# Altium PCB PCB V1.PCBDOC
Units mil, origin at the board's own origin, x right, y up, seen from the top; angles counter-clockwise.
Board outline 3040 x 4170 mil, 2 copper layers (Top Layer, Bottom Layer); 80 components, 0 nets, 300 pads, 0 vias.
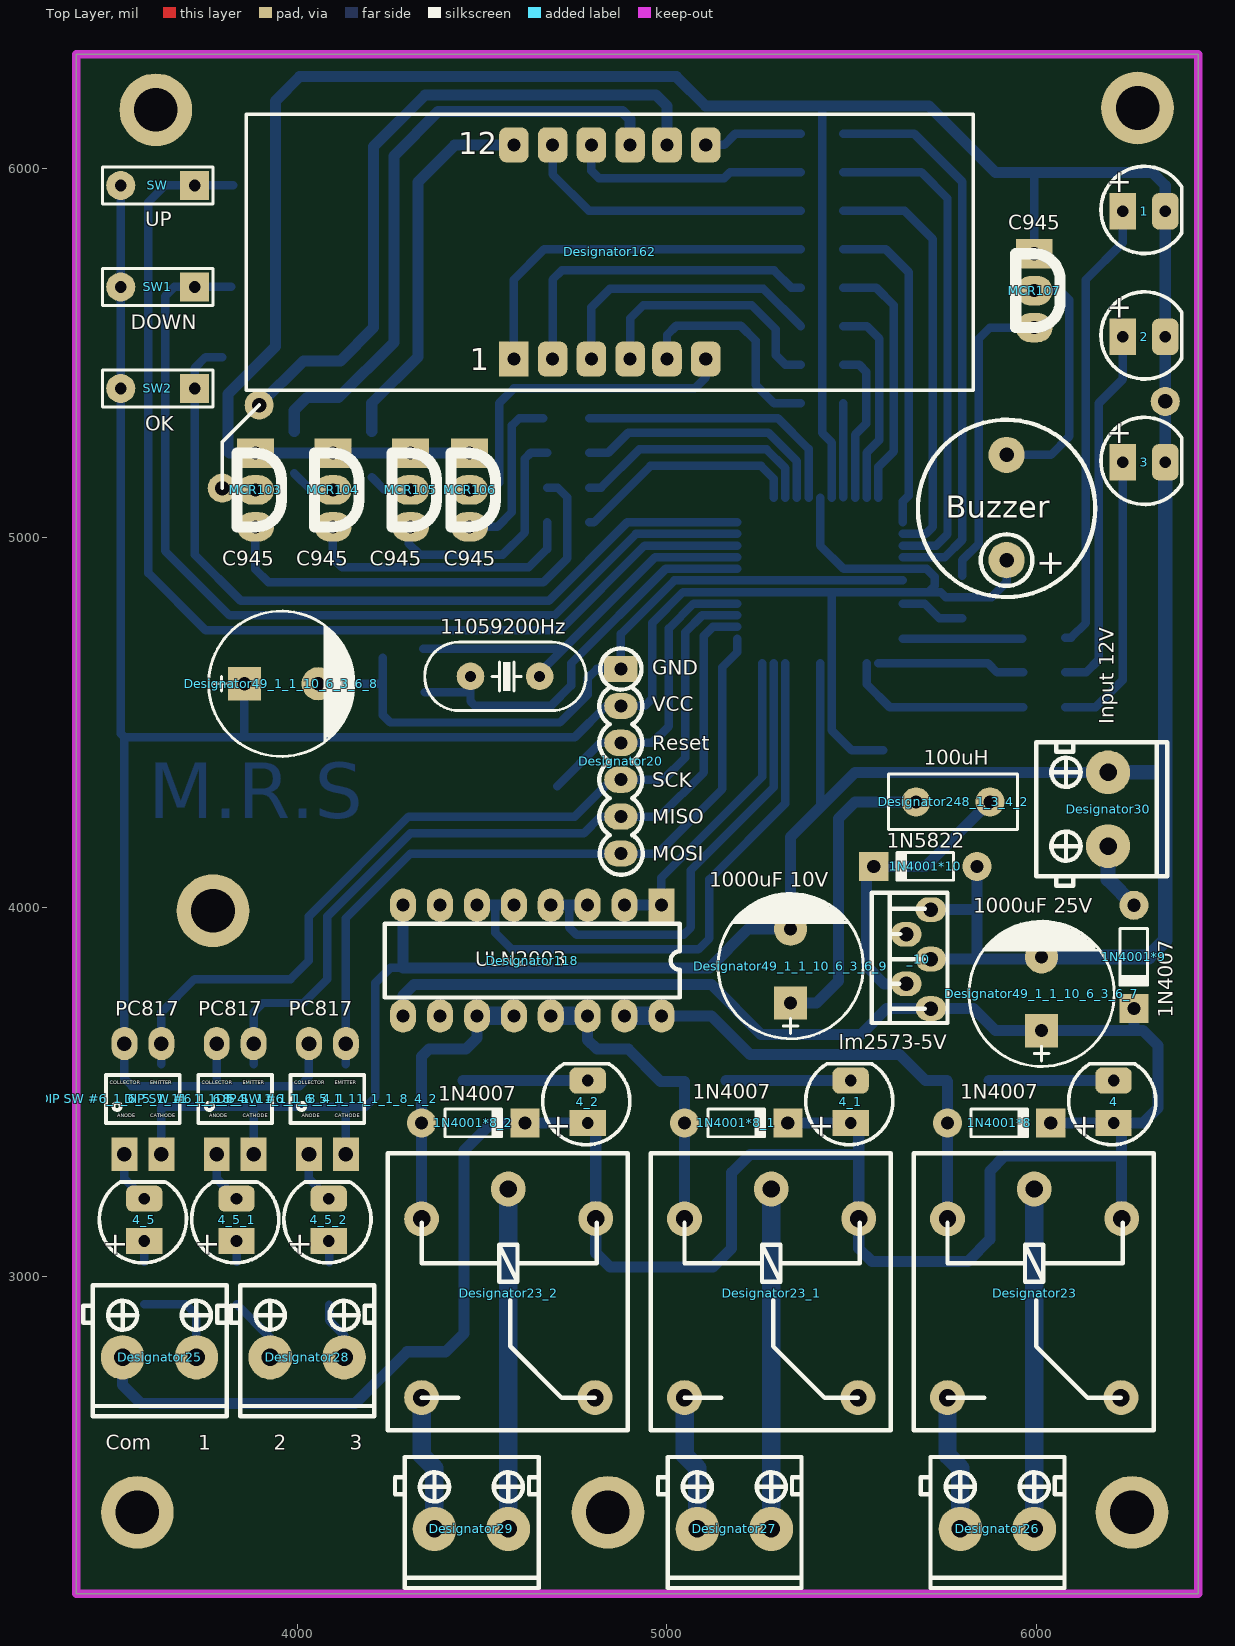
[diagram p0: Top Layer view]
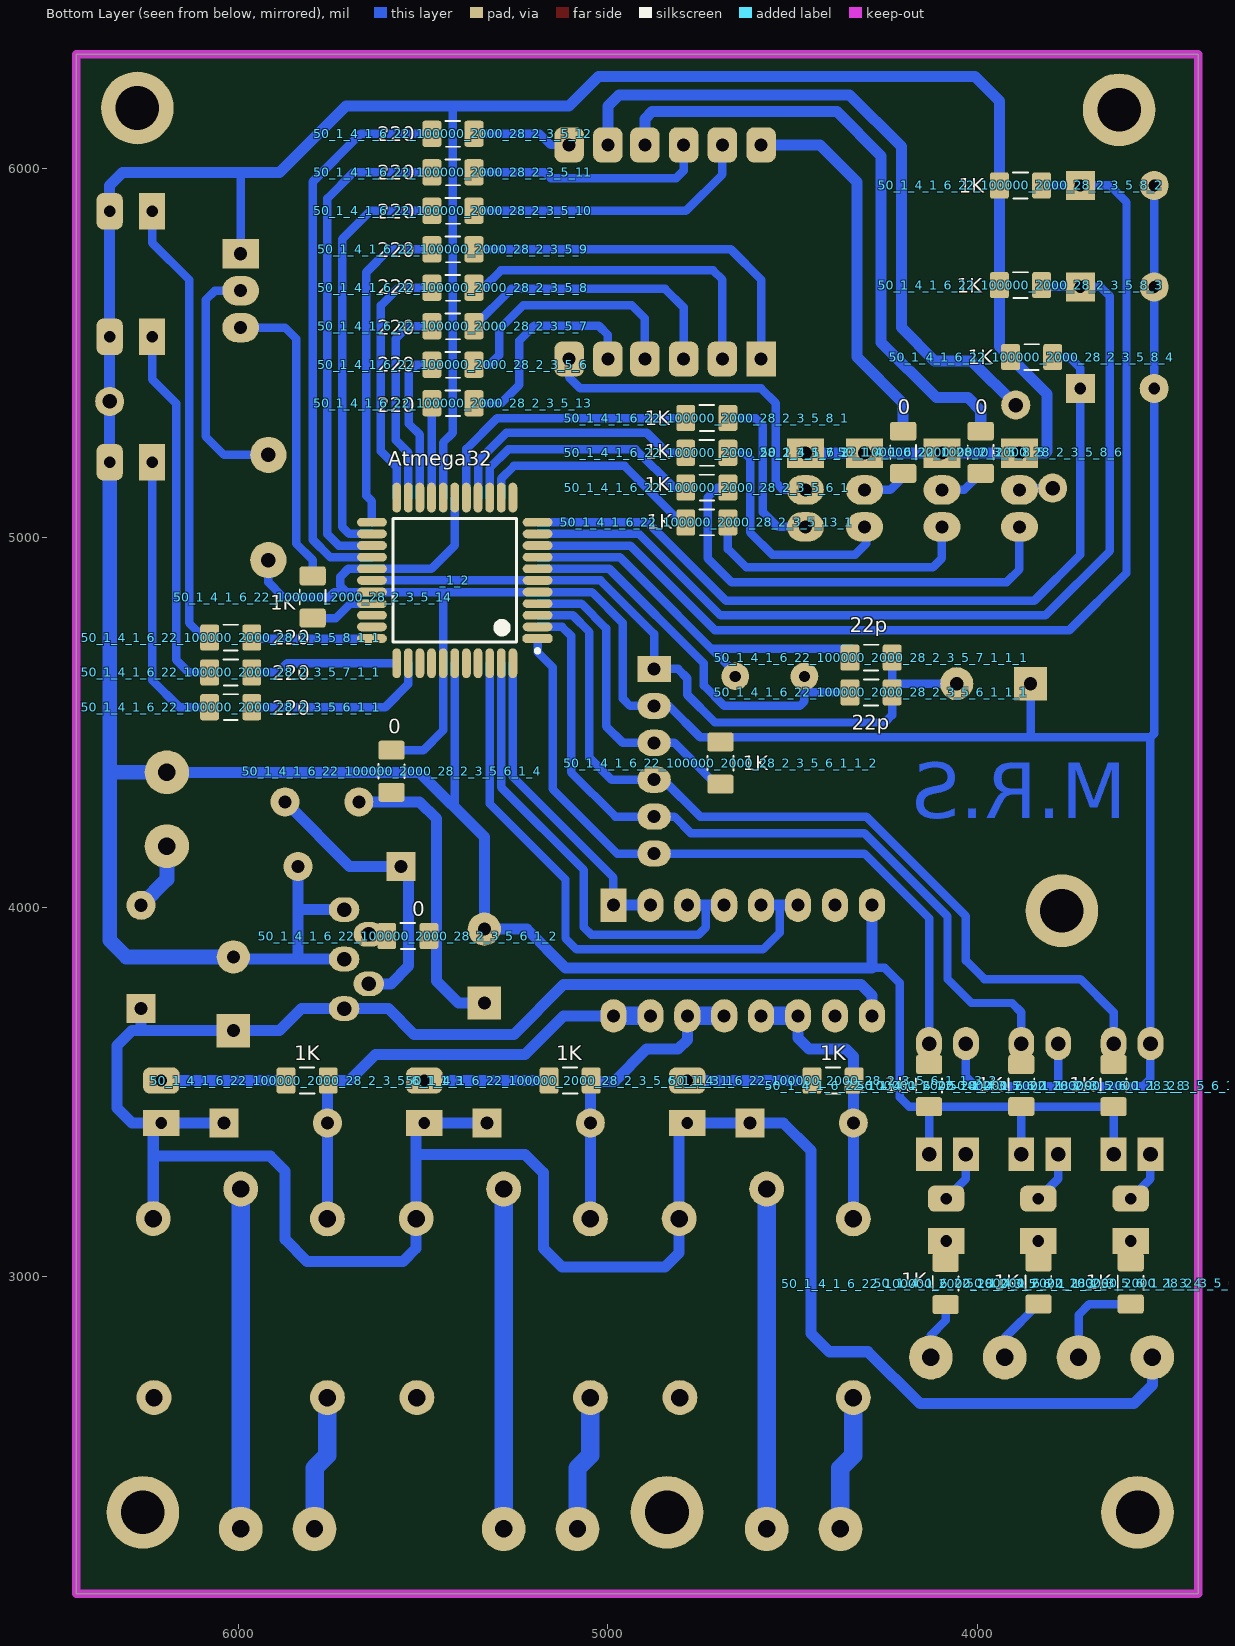
[diagram p1: Bottom Layer view, seen from below]

## Layer stack, top to bottom
Top Layer: signal copper 1.4
Dielectric: dielectric 12.6, FR-4, Dk 4.8
Bottom Layer: signal copper 1.4

## Board outline
3400,6310 6440,6310 6440,2140 3400,2140

## Design rules (kind name [scope] priority, off if disabled: settings)
Clearance [All] p1: gap=10
ComponentClearance [All] p1: gap=10 collisioncheckmode=3 verticalgap=10
PolygonConnect [All] p1: connectstyle=Relief reliefconductorwidth=10 reliefentries=4 polygonreliefangle="90 Angle"
RoutingVias [All] p1: holewidth=28 width=50 viastyle="Through Hole" minholewidth=28 minwidth=50 maxholewidth=28 maxwidth=50
SolderMaskExpansion [All] p1: expansion=4
TestPointUsage [All] p1: valid=0 allowmultiple=FALSE
Testpoint [All] p1: side=15 testpointundercomponent=TRUE minsize=40 maxsize=100 preferedsize=60 minholesize=0 maxholesize=40 preferedholesize=32 testpointgrid=1 style=1023 order=0-112345678
Width [All] p1: maxlimit=10 minlimit=10 preferedwidth=10
18 further rules are at their usual default settings.

## Components (designator, comment, footprint, x,y, rotation, side; value= is the part's Value field where it differs from the comment)
1 "Comment" LED-1 6290,5885 r90 top
1N4001*8 "Comment" DIO7.1-3.9x1.9 5900,3415 r0 top
1N4001*8_1 "Comment" DIO7.1-3.9x1.9 5187.5,3415 r0 top
1N4001*8_2 "Comment" DIO7.1-3.9x1.9 4475,3415 r0 top
1N4001*9 "Comment" DIO7.1-3.9x1.9 6265,3865 r270 top
1N4001*10 "Comment" DIO7.1-3.9x1.9 5700,4110 r180 top
2 "Comment" LED-1 6290,5545 r90 top
3 "Comment" LED-1 6290,5205 r90 top
4 "Comment" LED-1 6210,3470 r180 top
4_1 "Comment" LED-1 5497.5,3470 r180 top
4_2 "Comment" LED-1 4785,3470 r180 top
4_5 "Comment" LED-1 3583.69,3150 r180 top
4_5_1 "Comment" LED-1 3833.69,3150 r180 top
4_5_2 "Comment" LED-1 4083.69,3150 r180 top
50_1_4_1_6_22_100000_2000_28_2_3_5_6 "Comment" RESC3216X70N 5420,5469.29 r0 bottom
50_1_4_1_6_22_100000_2000_28_2_3_5_6_1 "Comment" RESC3216X70N 4732.09,5136.43 r0 bottom
50_1_4_1_6_22_100000_2000_28_2_3_5_6_1_1 "Comment" RESC3216X70N 6022.09,4541.43 r0 bottom
50_1_4_1_6_22_100000_2000_28_2_3_5_6_1_1_1 "Comment" RESC3216X70N 4287.09,4581.43 r0 bottom
50_1_4_1_6_22_100000_2000_28_2_3_5_6_1_1_2 "Comment" RESC3216X70N 4695,4390 r90 bottom
50_1_4_1_6_22_100000_2000_28_2_3_5_6_1_1_3 "Comment" RESC3216X70N 5815,3530 r180 bottom
50_1_4_1_6_22_100000_2000_28_2_3_5_6_1_1_3_1 "Comment" RESC3216X70N 5102.5,3530 r180 bottom
50_1_4_1_6_22_100000_2000_28_2_3_5_6_1_1_3_2 "Comment" RESC3216X70N 4390,3530 r180 bottom
50_1_4_1_6_22_100000_2000_28_2_3_5_6_1_1_3_3 "Comment" RESC3216X70N 4085,2980 r270 bottom
50_1_4_1_6_22_100000_2000_28_2_3_5_6_1_1_3_4 "Comment" RESC3216X70N 3833.69,2981.31 r270 bottom
50_1_4_1_6_22_100000_2000_28_2_3_5_6_1_1_3_5 "Comment" RESC3216X70N 3583.69,2981.31 r270 bottom
50_1_4_1_6_22_100000_2000_28_2_3_5_6_1_1_3_7 "Comment" RESC3216X70N 3630,3516.31 r270 bottom
50_1_4_1_6_22_100000_2000_28_2_3_5_6_1_1_3_8 "Comment" RESC3216X70N 3880,3516.31 r270 bottom
50_1_4_1_6_22_100000_2000_28_2_3_5_6_1_1_3_9 "Comment" RESC3216X70N 4130,3516.31 r270 bottom
50_1_4_1_6_22_100000_2000_28_2_3_5_6_1_2 "Comment" RESC3216X70N 5542.09,3921.43 r0 bottom
50_1_4_1_6_22_100000_2000_28_2_3_5_6_1_4 "Comment" RESC3216X70N 5586.43,4367.91 r270 bottom
50_1_4_1_6_22_100000_2000_28_2_3_5_7 "Comment" RESC3216X70N 5420,5573.57 r0 bottom
50_1_4_1_6_22_100000_2000_28_2_3_5_7_1 "Comment" RESC3216X70N 4732.09,5230.71 r0 bottom
50_1_4_1_6_22_100000_2000_28_2_3_5_7_1_1 "Comment" RESC3216X70N 6022.09,4635.71 r0 bottom
50_1_4_1_6_22_100000_2000_28_2_3_5_7_1_1_1 "Comment" RESC3216X70N 4287.09,4675.71 r0 bottom
50_1_4_1_6_22_100000_2000_28_2_3_5_8 "Comment" RESC3216X70N 5420,5677.86 r0 bottom
50_1_4_1_6_22_100000_2000_28_2_3_5_8_1 "Comment" RESC3216X70N 4732.09,5325 r0 bottom
50_1_4_1_6_22_100000_2000_28_2_3_5_8_1_1 "Comment" RESC3216X70N 6022.09,4730 r0 bottom
50_1_4_1_6_22_100000_2000_28_2_3_5_8_2 "Comment" RESC3216X70N 3882.09,5955 r0 bottom
50_1_4_1_6_22_100000_2000_28_2_3_5_8_3 "Comment" RESC3216X70N 3882.09,5685 r0 bottom
50_1_4_1_6_22_100000_2000_28_2_3_5_8_4 "Comment" RESC3216X70N 3852.09,5490 r0 bottom
50_1_4_1_6_22_100000_2000_28_2_3_5_8_5 "Comment" RESC3216X70N 4200,5232.09 r90 bottom
50_1_4_1_6_22_100000_2000_28_2_3_5_8_6 "Comment" RESC3216X70N 3990,5232.09 r90 bottom
50_1_4_1_6_22_100000_2000_28_2_3_5_9 "Comment" RESC3216X70N 5420,5782.14 r0 bottom
50_1_4_1_6_22_100000_2000_28_2_3_5_10 "Comment" RESC3216X70N 5420,5886.43 r0 bottom
50_1_4_1_6_22_100000_2000_28_2_3_5_11 "Comment" RESC3216X70N 5420,5990.71 r0 bottom
50_1_4_1_6_22_100000_2000_28_2_3_5_12 "Comment" RESC3216X70N 5420,6095 r0 bottom
50_1_4_1_6_22_100000_2000_28_2_3_5_13 "Comment" RESC3216X70N 5420,5365 r0 bottom
50_1_4_1_6_22_100000_2000_28_2_3_5_13_1 "Comment" RESC3216X70N 4732.09,5042.14 r0 bottom
50_1_4_1_6_22_100000_2000_28_2_3_5_14 "Comment" RESC3216X70N 5800,4840 r270 bottom
_1_2 "Comment" My_44A_M 5415,4885 r0 bottom
_10 "Comment" "CASE 314B–05" 5715,3725 r90 top
Buzzer "Comment" BUZZER 5920,4940 r270 top
Designator20 "Comment" SIP6 4875,4645 r270 top
Designator23 "Comment" RELAY3 5760,3155 r0 top
Designator23_1 "Comment" RELAY3 5047.5,3155 r0 top
Designator23_2 "Comment" RELAY3 4335,3155 r0 top
Designator25 "Comment" TER2 3525,2780 r180 top
Designator26 "Comment" TER2 5795,2315 r180 top
Designator27 "Comment" TER2 5082.5,2315 r180 top
Designator28 "Comment" TER2 3925,2780 r180 top
Designator29 "Comment" TER2 4370,2315 r180 top
Designator30 "Comment" TER2 6195,4165 r270 top
Designator49_1_1_10_6_3_6_7 "Comment" "cap 04" 6015,3765 r270 top
Designator49_1_1_10_6_3_6_8 "Comment" "cap 04" 3955,4605 r180 top
Designator49_1_1_10_6_3_6_9 "Comment" "cap 04" 5335,3840 r270 top
Designator118 "Comment" DIP16 4985,4005 r270 top
Designator162 "Comment" 7segCA 3860,5400 r0 top
Designator248_1_3_4_2 "" RAD-0.2 5775,4285 r180 top
"DIP SW #6_1_6_5_1_11_1_1_8_4" "Comment" "OPTO #1" 3530,3330 r0 top
"DIP SW #6_1_6_5_1_11_1_1_8_4_1" "Comment" "OPTO #1" 3780,3330 r0 top
"DIP SW #6_1_6_5_1_11_1_1_8_4_2" "Comment" "OPTO #1" 4030,3330 r0 top
MCR103 "" 2N5551 3885,5230 r180 top
MCR104 "" 2N5551 4095,5230 r180 top
MCR105 "" 2N5551 4305,5230 r180 top
MCR106 "" 2N5551 4465,5230 r180 top
MCR107 "" 2N5551 5995,5770 r180 top
SW "Comment" HDR1X3 3720,5955 r180 top
SW1 "Comment" HDR1X3 3720,5680 r180 top
SW2 "Comment" HDR1X3 3720,5405 r180 top
? "Comment" XTAL 4655,4625 r180 top

## Footprints (in the part's own frame and the unit in brackets; to place one, negate y for a bottom-side part, rotate by r counter-clockwise, add the part's x,y. Pads: shape width x height; smd on the part's side, far side on the other; paste and mask are expansions set on the pad)
2N5551 [mil]
  oval 100x80 hole 35.43: g(0,100) o(0,200)
  rect 100x80 hole 35.43: i(0,0)
  silkscreen extent -70,0 50,200
7segCA [mil] "7seg-CA; 12 Leads"
  rrect50% 80x94.49 hole 35.43: 1(725,665) 2(1040,665) 3(1140,665) 4(1245,85) .(935,85) A(830,665) B(1245,665) C(1040,85) D(830,85) F(935,665) G(1140,85)
  rect 80x94.49 hole 35.43: E(725,85)
  silkscreen extent 0,0 1970,748
BUZZER [mm]
  round 2.5 hole 1: 1(0,0) 2(-7.239,0)
  silkscreen extent -9.66,-6.1 2.54,6.1
"cap 04" [mil]
  rect 90x90 hole 35.43: 1(100,0)
  round 90 hole 35.43: 2(-100,0)
  silkscreen extent -197,-197 197,197, body extent -198,-197 198,199, height 513
"CASE 314B–05" [mm]
  oval 1.7x2.1 hole 1: 1(0,0) 2(1.702,1.702) 3(3.404,0) 4(5.105,1.702) 5(6.807,0)
  silkscreen extent -0.99,-1.14 7.98,4.06
DIO7.1-3.9x1.9 [mm]
  round 2 hole 0.9: 1(-3.55,0)
  rect 2x2 hole 0.9: 2(3.55,0)
  silkscreen extent -1.95,-0.95 2.05,0.95
DIP16 [mm]
  rect 2.3x1.8 hole 0.9: 1(0,0)
  oval 2.3x1.8 hole 0.9: 2(0,-2.54) 3(0,-5.08) 4(0,-7.62) 5(0,-10.16) 6(0,-12.7) 7(0,-15.24) 10(7.62,-15.24) 11(7.62,-12.7) 12(7.62,-10.16) 13(7.62,-7.62) 14(7.62,-5.08) 15(7.62,-2.54) 16(7.62,0) gnd(0,-17.78) vcc(7.62,-17.78)
  silkscreen extent 1.27,-19.05 6.35,1.27
HDR1X3 [mm]
  round 0 all layers, no hole: 2(2.54,0)
  round 2 hole 0.8: +(5.08,0)
  rect 2x2 hole 0.8: -(0,0)
  silkscreen extent -1.27,-1.27 6.35,1.27
LED-1 [mm] "LED; 2 Leads"
  rect 2.5x1.8 hole 0.8: 1(0,1.397)
  rrect50% 2.5x1.8 hole 0.8: 2(0,-1.524)
  silkscreen extent -2.91,-2.67 3.09,2.9
My_44A_M [mm]
  oval 2.05x0.6 smd: 7(-5.7,-0.8) 8(-5.7,-1.6) 10(-5.7,-3.2) 11(-5.7,-4) 23(5.7,-4) 24(5.7,-3.2) 25(5.7,-2.4) 31(5.7,2.4) 32(5.7,3.2) 33(5.7,4) A7(5.7,1.6) AREF(5.7,0.8) AVCC(5.7,-0.8) C7(5.7,-1.6) D0(-5.7,-2.4) GND(-5.7,0) GND(5.7,0) Miso(-5.7,3.2) RES(-5.7,1.6) SCk(-5.7,2.4) VCC(-5.7,0.8)
  oval 0.6x2.05 smd: 12(-4,-5.7) 13(-3.2,-5.7) 14(-2.4,-5.7) 15(-1.6,-5.7) 20(2.4,-5.7) 21(3.2,-5.7) 22(4,-5.7) 34(4,5.7) 35(3.2,5.7) 36(2.4,5.7) 41(-1.6,5.7) 42(-2.4,5.7) 43(-3.2,5.7) A0(1.6,5.7) B0(-0.8,5.7) C0(1.6,-5.7) D7(-0.8,-5.7) GND(0,5.7) GND(0.8,-5.7) ss(-4,5.7) VCC(0,-5.7) VCC(0.8,5.7)
  oct 2.05x0.6 smd: Mosi(-5.7,4)
  silkscreen extent -5.82,-4.25 4.25,4.97, body extent -5,-5 5,5, height 1.2
"OPTO #1" [mil]
  rect 70x90 hole 39.37: ANODE(0,0) CATHODE(100,0)
  oval 70x90 hole 39.37: COLLECTOR(0,300) EMITTER(100,300)
  silkscreen extent -50,85 150,215
RAD-0.2 [mm]
  round 2 hole 0.9: 1(-2.54,0) 2(2.54,0)
  silkscreen extent -4.44,-1.91 4.44,1.91
RELAY3 [mm]
  round 2.4 hole 1.2: 1(0,0) 2(11.989,0.025) 3(5.969,2.057) 4(11.938,-12.294) 5(0,-12.294)
  silkscreen extent -2.34,-14.55 14.2,4.52
RESC3216X70N [mm] "Chip Resistor, Body 3.2x1.6mm, EIA 1206, IPC Medium Density"
  round 0.508 on Mech15: 0(0,0)
  rrect25% 1.3x1.8 smd: 1(-1.45,0) 2(1.45,0)
  silkscreen extent -0.51,-0.89 0.51,0.89, body extent -1.62,-0.82 1.63,0.83, height 0.69
SIP6 [mm]
  rect 1.8x2.3 hole 0.9: 1(0,0)
  oval 1.8x2.3 hole 0.9: 2(2.54,0) 3(5.08,0) 4(7.62,0) 5(10.16,0) 6(12.7,0)
  silkscreen extent -1.42,-1.48 14.16,1.5
TER2 [mm]
  oval 3x3.048 hole 1.2: 1(0,0) 2(-5.08,0)
  silkscreen extent -7.16,-4.95 2.72,4.06
XTAL [mil]
  round 75 hole 30: 1(0,0) 2(187.4,0)
  silkscreen extent -126,-93 311,93, body extent -131,-94 316,95, height 514

## Part data
SW SW1 SW2: library part "Header 3"

## Free pads (board coordinates)
  round 196.85 hole 118.11: 0(3565,2360) 0(3615,6160) 0(3770,3990) 0(4840,2360) 0(6260,2360) 0(6275,6165)
  round 78.74 hole 39.37: 6(6350,5370) 7(3795,5135) 8(3895,5360)

## Nets (pads, with @x,y where several pads share a name; then routed paths per layer and width w, separated by ;. In a path a pad name is that pad's centre, name@x,y a point inside that pad or via, vN(x,y) a via of type N, cw(c..) or ccw(c..) an arc to the next point about the centre after c; other vN are vias at no path point)
pads on no net: 1.1 1.2 1N4001*8.1 1N4001*8.2 1N4001*8_1.1 1N4001*8_1.2 1N4001*8_2.1 1N4001*8_2.2 1N4001*9.1 1N4001*9.2 1N4001*10.1 1N4001*10.2 2.1 2.2 3.1 3.2 4.1 4.2 4_1.1 4_1.2 4_2.1 4_2.2 4_5.1 4_5.2 4_5_1.1 4_5_1.2 4_5_2.1 4_5_2.2 50_1_4_1_6_22_100000_2000_28_2_3_5_6.0 50_1_4_1_6_22_100000_2000_28_2_3_5_6.1 50_1_4_1_6_22_100000_2000_28_2_3_5_6.2 50_1_4_1_6_22_100000_2000_28_2_3_5_6_1.0 50_1_4_1_6_22_100000_2000_28_2_3_5_6_1.1 50_1_4_1_6_22_100000_2000_28_2_3_5_6_1.2 50_1_4_1_6_22_100000_2000_28_2_3_5_6_1_1.0 50_1_4_1_6_22_100000_2000_28_2_3_5_6_1_1.1 50_1_4_1_6_22_100000_2000_28_2_3_5_6_1_1.2 50_1_4_1_6_22_100000_2000_28_2_3_5_6_1_1_1.0 50_1_4_1_6_22_100000_2000_28_2_3_5_6_1_1_1.1 50_1_4_1_6_22_100000_2000_28_2_3_5_6_1_1_1.2 50_1_4_1_6_22_100000_2000_28_2_3_5_6_1_1_2.0 50_1_4_1_6_22_100000_2000_28_2_3_5_6_1_1_2.1 50_1_4_1_6_22_100000_2000_28_2_3_5_6_1_1_2.2 50_1_4_1_6_22_100000_2000_28_2_3_5_6_1_1_3.0 50_1_4_1_6_22_100000_2000_28_2_3_5_6_1_1_3.1 50_1_4_1_6_22_100000_2000_28_2_3_5_6_1_1_3.2 50_1_4_1_6_22_100000_2000_28_2_3_5_6_1_1_3_1.0 50_1_4_1_6_22_100000_2000_28_2_3_5_6_1_1_3_1.1 50_1_4_1_6_22_100000_2000_28_2_3_5_6_1_1_3_1.2 50_1_4_1_6_22_100000_2000_28_2_3_5_6_1_1_3_2.0 50_1_4_1_6_22_100000_2000_28_2_3_5_6_1_1_3_2.1 50_1_4_1_6_22_100000_2000_28_2_3_5_6_1_1_3_2.2 50_1_4_1_6_22_100000_2000_28_2_3_5_6_1_1_3_3.0 50_1_4_1_6_22_100000_2000_28_2_3_5_6_1_1_3_3.1 50_1_4_1_6_22_100000_2000_28_2_3_5_6_1_1_3_3.2 50_1_4_1_6_22_100000_2000_28_2_3_5_6_1_1_3_4.0 50_1_4_1_6_22_100000_2000_28_2_3_5_6_1_1_3_4.1 50_1_4_1_6_22_100000_2000_28_2_3_5_6_1_1_3_4.2 50_1_4_1_6_22_100000_2000_28_2_3_5_6_1_1_3_5.0 50_1_4_1_6_22_100000_2000_28_2_3_5_6_1_1_3_5.1 50_1_4_1_6_22_100000_2000_28_2_3_5_6_1_1_3_5.2 50_1_4_1_6_22_100000_2000_28_2_3_5_6_1_1_3_7.0 50_1_4_1_6_22_100000_2000_28_2_3_5_6_1_1_3_7.1 50_1_4_1_6_22_100000_2000_28_2_3_5_6_1_1_3_7.2 50_1_4_1_6_22_100000_2000_28_2_3_5_6_1_1_3_8.0 50_1_4_1_6_22_100000_2000_28_2_3_5_6_1_1_3_8.1 50_1_4_1_6_22_100000_2000_28_2_3_5_6_1_1_3_8.2 50_1_4_1_6_22_100000_2000_28_2_3_5_6_1_1_3_9.0 50_1_4_1_6_22_100000_2000_28_2_3_5_6_1_1_3_9.1 50_1_4_1_6_22_100000_2000_28_2_3_5_6_1_1_3_9.2 50_1_4_1_6_22_100000_2000_28_2_3_5_6_1_2.0 50_1_4_1_6_22_100000_2000_28_2_3_5_6_1_2.1 50_1_4_1_6_22_100000_2000_28_2_3_5_6_1_2.2 50_1_4_1_6_22_100000_2000_28_2_3_5_6_1_4.0 50_1_4_1_6_22_100000_2000_28_2_3_5_6_1_4.1 50_1_4_1_6_22_100000_2000_28_2_3_5_6_1_4.2 50_1_4_1_6_22_100000_2000_28_2_3_5_7.0 50_1_4_1_6_22_100000_2000_28_2_3_5_7.1 50_1_4_1_6_22_100000_2000_28_2_3_5_7.2 50_1_4_1_6_22_100000_2000_28_2_3_5_7_1.0 50_1_4_1_6_22_100000_2000_28_2_3_5_7_1.1 50_1_4_1_6_22_100000_2000_28_2_3_5_7_1.2 50_1_4_1_6_22_100000_2000_28_2_3_5_7_1_1.0 50_1_4_1_6_22_100000_2000_28_2_3_5_7_1_1.1 50_1_4_1_6_22_100000_2000_28_2_3_5_7_1_1.2 50_1_4_1_6_22_100000_2000_28_2_3_5_7_1_1_1.0 50_1_4_1_6_22_100000_2000_28_2_3_5_7_1_1_1.1 50_1_4_1_6_22_100000_2000_28_2_3_5_7_1_1_1.2 50_1_4_1_6_22_100000_2000_28_2_3_5_8.0 50_1_4_1_6_22_100000_2000_28_2_3_5_8.1 50_1_4_1_6_22_100000_2000_28_2_3_5_8.2 50_1_4_1_6_22_100000_2000_28_2_3_5_8_1.0 50_1_4_1_6_22_100000_2000_28_2_3_5_8_1.1 50_1_4_1_6_22_100000_2000_28_2_3_5_8_1.2 50_1_4_1_6_22_100000_2000_28_2_3_5_8_1_1.0 50_1_4_1_6_22_100000_2000_28_2_3_5_8_1_1.1 50_1_4_1_6_22_100000_2000_28_2_3_5_8_1_1.2 50_1_4_1_6_22_100000_2000_28_2_3_5_8_2.0 50_1_4_1_6_22_100000_2000_28_2_3_5_8_2.1 50_1_4_1_6_22_100000_2000_28_2_3_5_8_2.2 50_1_4_1_6_22_100000_2000_28_2_3_5_8_3.0 50_1_4_1_6_22_100000_2000_28_2_3_5_8_3.1 50_1_4_1_6_22_100000_2000_28_2_3_5_8_3.2 50_1_4_1_6_22_100000_2000_28_2_3_5_8_4.0 50_1_4_1_6_22_100000_2000_28_2_3_5_8_4.1 50_1_4_1_6_22_100000_2000_28_2_3_5_8_4.2 50_1_4_1_6_22_100000_2000_28_2_3_5_8_5.0 50_1_4_1_6_22_100000_2000_28_2_3_5_8_5.1 50_1_4_1_6_22_100000_2000_28_2_3_5_8_5.2 50_1_4_1_6_22_100000_2000_28_2_3_5_8_6.0 50_1_4_1_6_22_100000_2000_28_2_3_5_8_6.1 50_1_4_1_6_22_100000_2000_28_2_3_5_8_6.2 50_1_4_1_6_22_100000_2000_28_2_3_5_9.0 50_1_4_1_6_22_100000_2000_28_2_3_5_9.1 50_1_4_1_6_22_100000_2000_28_2_3_5_9.2 50_1_4_1_6_22_100000_2000_28_2_3_5_10.0 50_1_4_1_6_22_100000_2000_28_2_3_5_10.1 50_1_4_1_6_22_100000_2000_28_2_3_5_10.2 50_1_4_1_6_22_100000_2000_28_2_3_5_11.0 50_1_4_1_6_22_100000_2000_28_2_3_5_11.1 50_1_4_1_6_22_100000_2000_28_2_3_5_11.2 50_1_4_1_6_22_100000_2000_28_2_3_5_12.0 50_1_4_1_6_22_100000_2000_28_2_3_5_12.1 50_1_4_1_6_22_100000_2000_28_2_3_5_12.2 50_1_4_1_6_22_100000_2000_28_2_3_5_13.0 50_1_4_1_6_22_100000_2000_28_2_3_5_13.1 50_1_4_1_6_22_100000_2000_28_2_3_5_13.2 50_1_4_1_6_22_100000_2000_28_2_3_5_13_1.0 50_1_4_1_6_22_100000_2000_28_2_3_5_13_1.1 50_1_4_1_6_22_100000_2000_28_2_3_5_13_1.2 50_1_4_1_6_22_100000_2000_28_2_3_5_14.0 50_1_4_1_6_22_100000_2000_28_2_3_5_14.1 50_1_4_1_6_22_100000_2000_28_2_3_5_14.2 "DIP SW #6_1_6_5_1_11_1_1_8_4.ANODE" "DIP SW #6_1_6_5_1_11_1_1_8_4.CATHODE" "DIP SW #6_1_6_5_1_11_1_1_8_4.COLLECTOR" "DIP SW #6_1_6_5_1_11_1_1_8_4.EMITTER" "DIP SW #6_1_6_5_1_11_1_1_8_4_1.ANODE" "DIP SW #6_1_6_5_1_11_1_1_8_4_1.CATHODE" "DIP SW #6_1_6_5_1_11_1_1_8_4_1.COLLECTOR" "DIP SW #6_1_6_5_1_11_1_1_8_4_1.EMITTER" "DIP SW #6_1_6_5_1_11_1_1_8_4_2.ANODE" "DIP SW #6_1_6_5_1_11_1_1_8_4_2.CATHODE" "DIP SW #6_1_6_5_1_11_1_1_8_4_2.COLLECTOR" "DIP SW #6_1_6_5_1_11_1_1_8_4_2.EMITTER" ?.1 ?.2 _1_2.7 _1_2.8 _1_2.10 _1_2.11 _1_2.12 _1_2.13 _1_2.14 _1_2.15 _1_2.20 _1_2.21 _1_2.22 _1_2.23 _1_2.24 _1_2.25 _1_2.31 _1_2.32 _1_2.33 _1_2.34 _1_2.35 _1_2.36 _1_2.41 _1_2.42 _1_2.43 _1_2.A0 _1_2.A7 _1_2.AREF _1_2.AVCC _1_2.B0 _1_2.C0 _1_2.C7 _1_2.D0 _1_2.D7 _1_2.GND _1_2.Miso _1_2.Mosi _1_2.RES _1_2.SCk _1_2.ss _1_2.VCC _10.1 _10.2 _10.3 _10.4 _10.5 Buzzer.1 Buzzer.2 Designator20.1 Designator20.2 Designator20.3 Designator20.4 Designator20.5 Designator20.6 Designator23.1 Designator23.2 Designator23.3 Designator23.4 Designator23.5 Designator23_1.1 Designator23_1.2 Designator23_1.3 Designator23_1.4 Designator23_1.5 Designator23_2.1 Designator23_2.2 Designator23_2.3 Designator23_2.4 Designator23_2.5 Designator25.1 Designator25.2 Designator26.1 Designator26.2 Designator27.1 Designator27.2 Designator28.1 Designator28.2 Designator29.1 Designator29.2 Designator30.1 Designator30.2 Designator49_1_1_10_6_3_6_7.1 Designator49_1_1_10_6_3_6_7.2 Designator49_1_1_10_6_3_6_8.1 Designator49_1_1_10_6_3_6_8.2 Designator49_1_1_10_6_3_6_9.1 Designator49_1_1_10_6_3_6_9.2 Designator118.1 Designator118.2 Designator118.3 Designator118.4 Designator118.5 Designator118.6 Designator118.7 Designator118.10 Designator118.11 Designator118.12 Designator118.13 Designator118.14 Designator118.15 Designator118.16 Designator118.gnd Designator118.vcc Designator162.1 Designator162.2 Designator162.3 Designator162.4 Designator162.. Designator162.A Designator162.B Designator162.C Designator162.D Designator162.E Designator162.F Designator162.G Designator248_1_3_4_2.1 Designator248_1_3_4_2.2 MCR103.g MCR103.i MCR103.o MCR104.g MCR104.i MCR104.o MCR105.g MCR105.i MCR105.o MCR106.g MCR106.i MCR106.o MCR107.g MCR107.i MCR107.o SW1.2 SW1.+ SW1.- SW2.2 SW2.+ SW2.- SW.2 SW.+ SW.-
copper on no net: | length 92088.5
  Bottom Layer w23: 3520,5955 3520,4470 3530,4460 ; 3530,3330 3530,3263.69 3583.69,3210 ; 3583.69,2924.22 3695.78,2924.22 3725,2895 3725,2780 ; 3583.69,3038.4 3583.69,3095 ; 3630,3330 3630,3459.22 4130,3459.22 ; 3630,3573.4 3630,3630 3630,3715 3720,3805 3980,3805 4030,3855 4030,3975 4300,4245 4750,4245 4850,4345 ; 3780,3330 3780,3263.69 3833.69,3210 ; 3780,3515 3780,3630 ; 3795,5135 3880,5135 ; 3795,5490 3750,5490 3720,5460 3720,4955 3845,4830 4680,4830 4892.48,5042.48 5190.59,5042.48 ; 3820,5680 3720,5680 3665,5680 3640,5655 3640,4965 3815,4790 4695,4790 4915.98,5010.98 5190.59,5010.98 ; 3825,5955 3720,5955 3640,5955 3595,5910 3595,4905 3750,4750 4710,4750 4939.49,4979.49 5190.59,4979.49 ; 3833.69,2924.22 3925,2832.91 3925,2780 ; 3833.69,3038.4 3833.69,3095 ; 3855,4465 3855,4605 ; 3880,3330 3880,3459.22 ; 3880,3573.4 3880,3630 3880,3715 3905,3740 4015,3740 4080,3805 4080,3975 4305,4200 4775,4200 4820,4245 4875,4245 4980,4245 5100,4365 5100,4735 5124.02,4759.02 5190.59,4759.02 ; 3885,5030 3885,4915 3920,4880 4665,4880 4730,4945 4730,5110 4703.57,5136.43 4675,5136.43 ; 3990,5175 4035,5130 4095,5130 ; 4030,3330 4030,3263.69 4083.69,3210 ; 4030,3630 4030,3540 4005,3515 3550,3515 3530,3535 3530,3630 3530,4460 ; 4055,4605 4230,4605 ; 4085,2922.91 4085,2880 4125,2840 4125,2780 ; 4085,3037.09 4085,3093.69 ; 4095,5030 4095,4945 4120,4920 4625,4920 4675,4970 4675,5042.14 ; 4130,3330 4130,3459.22 ; 4130,3573.4 4130,3630 4130,3970 4305,4145 4875,4145 4975,4145 5150,4320 5150,4650 5190.59,4690.59 5190.59,4727.52 ; 4200,5165 4235,5130 4305,5130 ; 4230,4675.71 4230,4520 4250,4500 4710,4500 4785,4575 4785,4620 4810,4645 4875,4645 4875,4740 5020,4885 5190.59,4885 5639.41,4885 ; 4300,5025 4300,4985 4330,4955 4555,4955 4615,5015 4615,5215 4630.71,5230.71 4675,5230.71 ; 4325,3835 4250,3835 4210,3795 4210,3485 4184.22,3459.22 4130,3459.22 ; 4340,4700 4715,4700 ; 4344.17,4581.43 4466.17,4581.43 ; 4465,5030 4540,5030 4580,5070 4580,5305 4600,5325 4665,5325 ; 4465,5130 4525,5130 4545,5150 4545,5365 4585,5405 5075,5405 5105,5435 5105,5485 ; 4467.6,4625 4467.6,4557.4 4480,4545 4685,4545 4740,4600 4740,4660 4996.5,4916.5 5190.59,4916.5 ; 4535,4005 4535,3930 4580,3885 5085,3885 5115,3915 5115,4075 5320.51,4280.51 5320.51,4660.59 ; 4585,5485 4585,5700 4667.14,5782.14 5362.91,5782.14 ; 4650,4630 4967.99,4947.99 5190.59,4947.99 ; 4690,5485 4690,5700 4715,5725 5290,5725 5337.14,5677.86 5362.91,5677.86 ; 4690,6065 4690,5985 4788.57,5886.43 5362.91,5886.43 ; 4702.91,4327.91 4820,4445 4875,4445 4960,4445 5005,4490 5005,4755 5072.01,4822.01 5190.59,4822.01 ; 4735,4005 4735,3945 4755,3925 5045,3925 5065,3945 5065,4100 5289.02,4324.02 5289.02,4660.59 ; 4789.17,5042.14 4802.14,5042.14 4955,5195 5255,5195 5289.02,5160.98 5289.02,5109.41 ; 4789.17,5136.43 4821.43,5136.43 4925,5240 5270,5240 5320.51,5189.49 5320.51,5109.41 ; 4789.17,5230.71 4840.71,5230.71 4895,5285 5275,5285 5352.01,5207.99 5352.01,5109.41 ; 4789.17,5325 5300,5325 5383.5,5241.5 5383.5,5109.41 ; 4795,5485 4795,5625 4845,5675 5261.48,5675 5362.91,5573.57 ; 4795,6065 4795,5995 4815,5975 5155,5975 5170.71,5990.71 5362.91,5990.71 ; 4875,4345 4990,4345 5050,4405 5050,4745 5095.51,4790.51 5190.59,4790.51 ; 4900,5485 4900,5595 4935,5630 5230,5630 5295,5565 5295,5495 5320.71,5469.29 5362.91,5469.29 ; 4985,4005 4985,4080 5257.52,4352.52 5257.52,4660.59 ; 5000,5485 5000,5550 5025,5575 5200,5575 5240,5535 5240,5415 5290,5365 5362.91,5365 ; 5105,6065 5155,6065 5185,6095 5362.91,6095 ; 5415,4275 5415,4660.59 ; 5415,5109.41 5415,4980 5478.5,4916.5 5639.41,4916.5 5703.5,4916.5 5725,4895 5725,4870 5708.5,4853.5 ; 5420,6155 5420,5285 5446.5,5258.5 5446.5,5109.41 ; 5446.5,4852.01 5446.5,4660.59 5446.5,4478.5 5500,4425 5586.43,4425 ; 5477.09,5110.31 5477.09,5365 ; 5477.09,5469.29 5520.71,5469.29 5540,5450 5540,5310 5509.49,5279.49 5509.49,5109.41 ; 5477.09,5573.57 5541.43,5573.57 5575,5540 5575,5265 5540.98,5230.98 5540.98,5109.41 ; 5477.09,5677.86 5567.14,5677.86 5615,5630 5615,5235 5572.48,5192.48 5572.48,5109.41 ; 5477.09,5782.14 5592.86,5782.14 5655,5720 5655,5115 5639.41,5099.41 5639.41,5042.48 ; 5477.09,5886.43 5643.57,5886.43 5720,5810 5720,5030 5700.98,5010.98 5639.41,5010.98 ; 5477.09,5990.71 5689.29,5990.71 5760,5920 5760,5010 5729.49,4979.49 5639.41,4979.49 ; 5477.09,6095 5670,6095 5800,5965 5800,4995 5752.99,4947.99 5639.41,4947.99 ; 5540.98,4660.59 5540.98,4604.02 5603.57,4541.43 5965,4541.43 ; 5572.48,4660.59 5869.41,4660.59 5894.29,4635.71 5965,4635.71 ; 5639.41,4727.52 5962.52,4727.52 ; 5639.41,4822.01 5697.99,4822.01 5737.09,4782.91 5800,4782.91 ; 5800,4897.09 5800,4940 5845,4985 5845,5540 5875,5570 5995,5570 ; 5920,4940 5920,4880 5880,4840 5755,4840 5741.5,4853.5 5708.5,4853.5 ; 5920,5225 6040,5225 6090,5275 6090,5645 6065,5670 5995,5670 ; 5995,5770 5995,5990 ; 6079.17,4541.43 6161.43,4541.43 6235,4615 6235,5205 ; 6079.17,4635.71 6135.71,4635.71 6170,4670 6170,5365 6235,5430 6235,5545 ; 6079.17,4730 6095,4730 6135,4770 6135,5700 6235,5800 6235,5885 ; 3530,4460 4750,4460 4835,4545 4875,4545 4940,4545 4960,4565 4960,4770 5043.5,4853.5 5190.59,4853.5 5639.41,4853.5 5708.5,4853.5
  Bottom Layer w30: 3525,2780 3525,2705 3575,2655 4155,2655 4295,2795 4400,2795 4450,2845 4450,3340 4525,3415 4614.76,3415 4785,3415 ; 3895,5360 4015,5480 4115,5480 4205,5570 4205,6060 4345,6200 4970,6200 5000,6170 5000,6065 ; 3990,5289.17 3990,5345 4025,5380 4110,5380 4260,5530 4260,6035 4380,6155 4880,6155 4900,6135 4900,6065 ; 4200,5289.17 4200,5365 4325,5490 4325,5965 4425,6065 4585,6065 ; 4285,3705 4285,3760 4315,3790 5120,3790 5255,3655 5525,3655 5595,3725 5715,3725 5830,3725 5890,3665 6015,3665 6290,3665 6330,3625 6330,3455 6290,3415 6210,3415 6039.76,3415 ; 4285,4005 4285,3835 4325,3835 5115,3835 5220,3940 5335,3940 5335,4190 5510,4365 6195,4365 ; 4335,3155 4335,3414.76 ; 4335.24,3415 4335.24,3527.68 ; 4335.24,3520 4335.24,3595.24 4355,3615 4455,3615 4485,3645 4485,3705 ; 4447.09,3530 4785,3530 ; 4465,5230 3815,5230 3810,5235 3810,5390 3939.17,5519.17 3939.17,6060 3939.17,6184.17 4005,6250 5025,6250 5105,6170 5710,6170 5890,5990 6315,5990 6350,5955 6350,5205 ; 4485,4005 4585,4005 ; 4685,4005 4785,4005 ; 4785,3705 4785,3640 4810,3615 4895,3615 4982.32,3527.68 5047.74,3527.68 5047.74,3415 ; 4807,3408 4807,3156 4807,3063 4845,3025 5125,3025 5175,3075 5175,3280 5225,3330 5519.5,3330 ; 4885,4005 4985,4005 ; 4985,3705 5120,3705 5225,3600 5630,3600 5700,3530 5757.91,3530 ; 5047.5,3155 5047.5,3414.76 ; 5159.59,3530 5497.5,3530 ; 5327.26,3415 5497.5,3415 ; 5335,3740 5405,3740 5465,3800 5465,4240 5510,4285 5675,4285 ; 5519.5,3408 5519.5,3156 5519.5,3075.5 5555,3040 5815,3040 5875,3100 5875,3285 5915,3325 6232,3325 ; 5648,3792 5588,3792 5540,3840 5540,4110 5700,4110 5870,4280 5880,4280 ; 5715,3859 6009,3859 ; 5715,3993 5839.76,3993 ; 5760,3155 5760,3414.76 ; 5760.24,3415 5760.24,3527.68 ; 5839.76,3863.76 5839.76,4110 ; 5872.09,3530 6210,3530 ; 6232,3156 6232,3408 ; 6265,3665 6265,3725.24
  Bottom Layer w40: 6015,3865 6305,3865 6350,3910 6350,5205 ; 6195,4165 6195,4074.76 6265,4004.76 ; 6195,4365 6350,4365
  Bottom Layer w50: 4335,2671 4335,2515 4370,2480 4370,2315 ; 4485,3705 4585,3705 ; 4570,2315 4570,3236 ; 4675,3705 4785,3705 ; 4885,3705 4985,3705 ; 5047.5,2671 5047.5,2515 5082.5,2480 5082.5,2315 ; 5282.5,2315 5282.5,3236 ; 5760,2671 5760,2515 5795,2480 5795,2315 ; 5995,2315 5995,3236

## Keep-outs
Keep-Out Layer:
  the board outline again, w23

## Other copper
Bottom Layer:
  text "M.R.S" at 3595,4240 h150

## Silkscreen, mask and mechanical layers (free items; w line width, h text height)
Top Overlay:
  lines w10: 3795,5135 3795,5260 3895,5360
  text "UP" at 3586.68,5845 h40
  text "C945" at 5925,5835 h40
  text "DOWN" at 3546.69,5565 h40
  text "OK" at 3586.68,5290 h40
  text "C945" at 3795,4925 h40
  text "C945" at 3995,4925 h40
  text "C945" at 4195,4925 h40
  text "C945" at 4395,4925 h40
  text "11059200Hz" at 4385,4740 h40
  text "GND" at 4960,4630 h40
  text "VCC" at 4960,4530 h40
  text "Input 12V" at 6210,4495 h40 r90
  text "Reset" at 4960,4425 h40
  text "100uH" at 5695,4385 h40
  text "SCK" at 4960,4325 h40
  text "MISO" at 4960,4225 h40
  text "1N5822" at 5595,4160 h40
  text "MOSI" at 4960,4125 h40
  text "1000uF 10V" at 5115,4055 h40
  text "1000uF 25V" at 5830,3985 h40
  text "ULN2003" at 4480,3840 h40
  text "PC817" at 3505,3705 h40
  text "PC817" at 3730,3705 h40
  text "PC817" at 3975,3705 h40
  text "1N4007" at 6370,3700 h40 r90
  text "lm2573-5V" at 5465,3615 h40
  text "1N4007" at 5070,3480 h40
  text "1N4007" at 5795,3480 h40
  text "1N4007" at 4380,3475 h40
  text "Com" at 3480,2530 h40
  text "1" at 3730,2530 h40
  text "2" at 3935,2530 h40
  text "3" at 4140,2530 h40
Bottom Overlay:
  text "220" at 5625,6075 h40
  text "220" at 5625,5970 h40
  text "1K" at 4050,5935 h40
  text "220" at 5625,5865 h40
  text "220" at 5625,5760 h40
  text "1K" at 4055,5665 h40
  text "220" at 5625,5660 h40
  text "220" at 5625,5550 h40
  text "1K" at 4025,5470 h40
  text "220" at 5625,5450 h40
  text "220" at 5625,5340 h40
  text "0" at 4005,5335 h40
  text "0" at 4215,5335 h40
  text "1K" at 4900,5305 h40
  text "1K" at 4900,5215 h40
  text "Atmega32" at 5595,5195 h40
  text "1K" at 4900,5125 h40
  text "1K" at 4895,5025 h40
  text "1K" at 5915,4805 h40
  text "22p" at 4345,4745 h40
  text "220" at 5910,4710 h40
  text "220" at 5910,4615 h40
  text "220" at 5910,4520 h40
  text "22p" at 4340,4480 h40
  text "0" at 5595,4470 h40
  text "1K" at 4635,4370 h40
  text "0" at 5530,3975 h40
  text "1K" at 4425,3585 h40
  text "1K" at 5140,3585 h40
  text "1K" at 5850,3585 h40
  text "1K" at 3750,3500 h40
  text "1K" at 4000,3500 h40
  text "1K" at 4250,3500 h40
  text "1K" at 4205,2970 h40
  text "1K" at 3705,2965 h40
  text "1K" at 3955,2965 h40

## Dimensions
6440,6310 to 6440,2140 on Top Overlay
6440,6310 to 3400,6310 on Top Overlay

## Text inside footprints (layer, text, board x,y; h text height)
1: Top Overlay "+" at 6260,5990 h60 r180
2: Top Overlay "+" at 6260,5650 h60 r180
3: Top Overlay "+" at 6260,5310 h60 r180
4: Top Overlay "+" at 6105,3440 h60 r270
4_1: Top Overlay "+" at 5392.5,3440 h60 r270
4_2: Top Overlay "+" at 4680,3440 h60 r270
4_5: Top Overlay "+" at 3478.69,3120 h60 r270
4_5_1: Top Overlay "+" at 3728.69,3120 h60 r270
4_5_2: Top Overlay "+" at 3978.69,3120 h60 r270
Buzzer: Top Overlay "+" at 6010,4970 h66.93 r270
Designator162: Top Overlay "1" at 4465,5455 h60; Top Overlay "12" at 4435,6040 h60
"DIP SW #6_1_6_5_1_11_1_1_8_4": Top Overlay "EMITTER" at 3600,3520 h10; Top Overlay "COLLECTOR" at 3490,3520 h10; Top Overlay "CATHODE" at 3600,3430 h10; Top Overlay "ANODE" at 3510,3430 h10
"DIP SW #6_1_6_5_1_11_1_1_8_4_1": Top Overlay "EMITTER" at 3850,3520 h10; Top Overlay "COLLECTOR" at 3740,3520 h10; Top Overlay "CATHODE" at 3850,3430 h10; Top Overlay "ANODE" at 3760,3430 h10
"DIP SW #6_1_6_5_1_11_1_1_8_4_2": Top Overlay "EMITTER" at 4100,3520 h10; Top Overlay "COLLECTOR" at 3990,3520 h10; Top Overlay "CATHODE" at 4100,3430 h10; Top Overlay "ANODE" at 4010,3430 h10